# Altium PCB recovery.PcbDoc (part 1 of 2)
Units mm, origin at the board's own origin, x right, y up, seen from the top; angles counter-clockwise.
Board outline 117.35 x 49.91 mm, 2 copper layers (Top Layer, Bottom Layer); 218 components, 132 nets, 666 pads, 35 vias.
Unrouted connection lines stored in the file: 377.
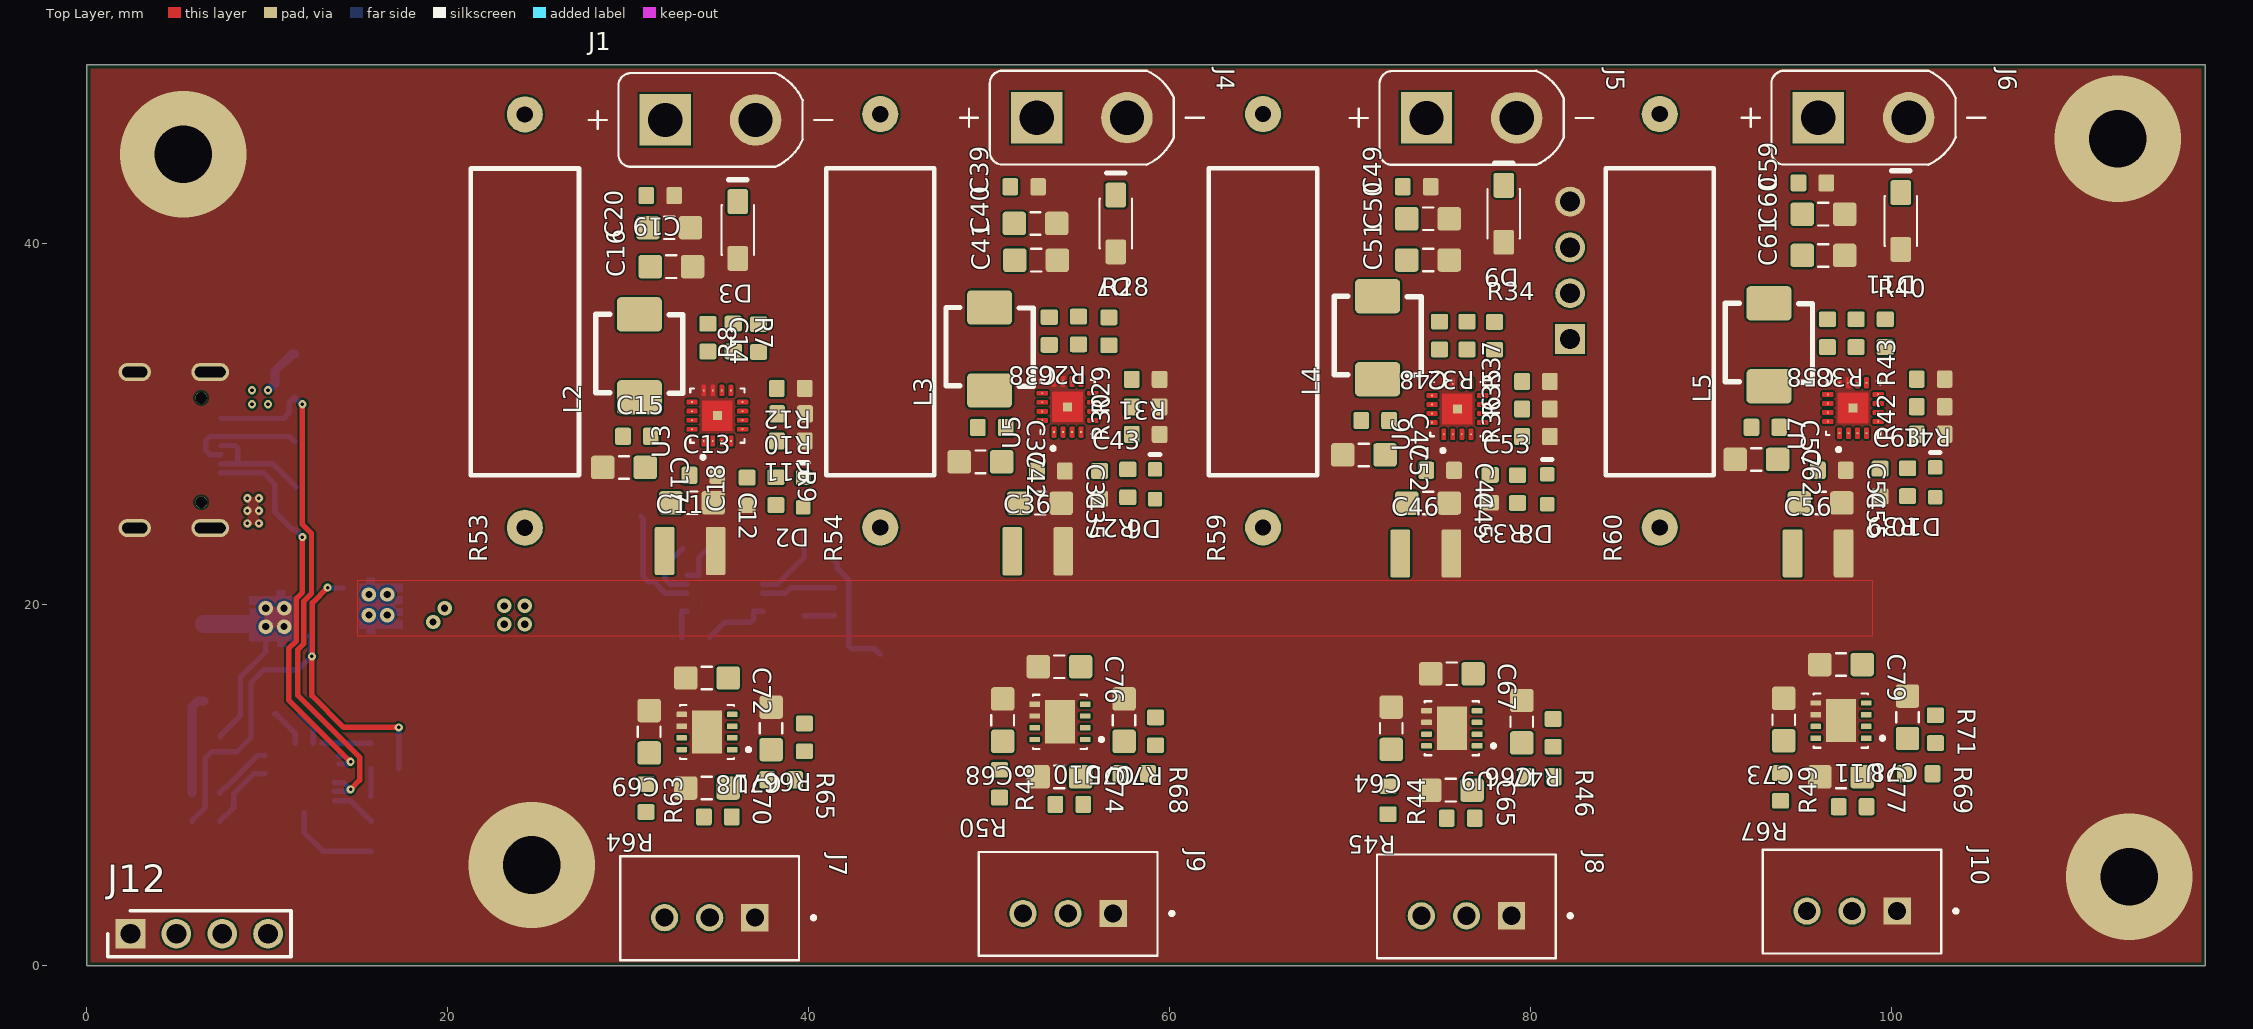
[diagram p0: Top Layer view]
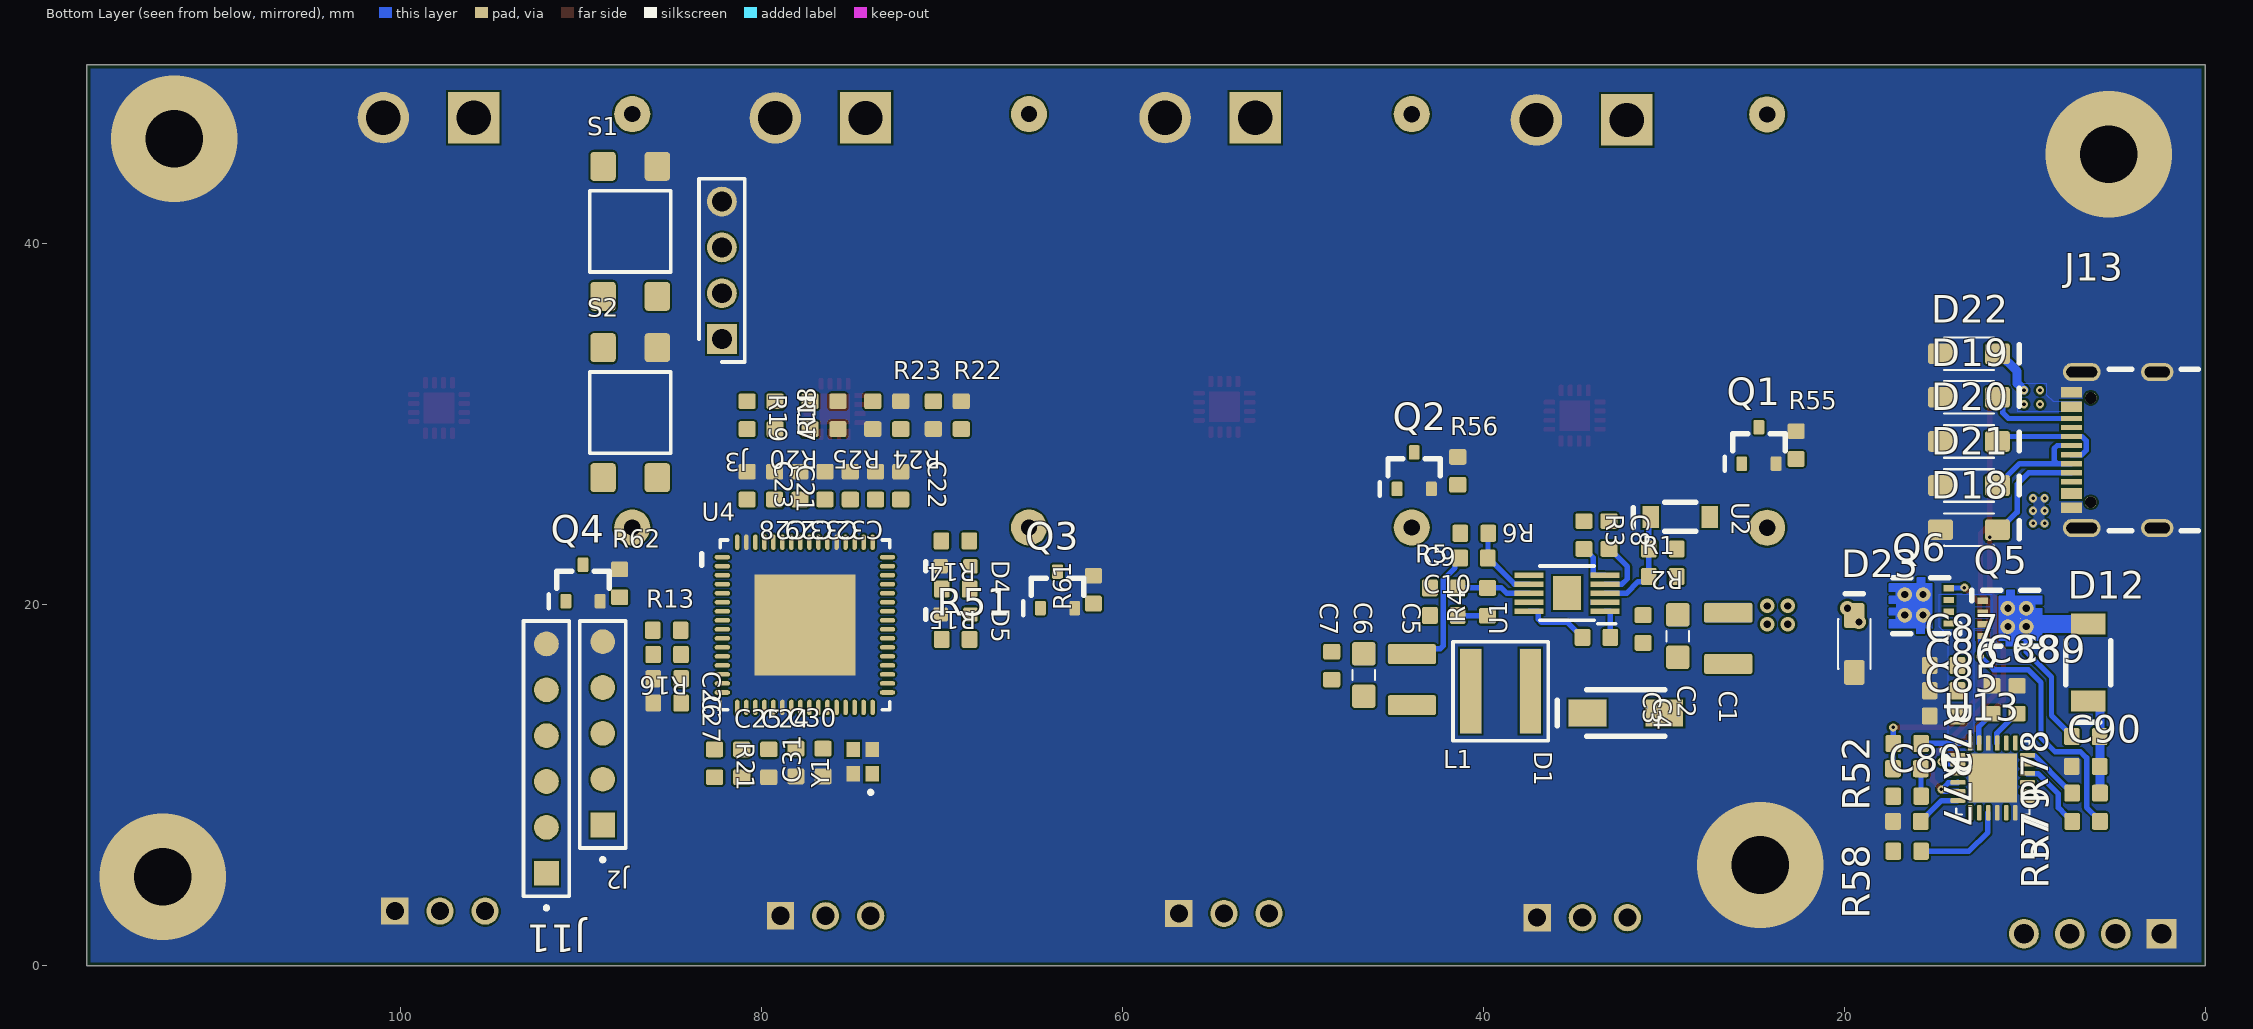
[diagram p1: Bottom Layer view, seen from below]

## Layer stack, top to bottom
Top Solder: solder mask 0.0102, Solder Resist, Dk 3.5
Top Layer: signal copper 0.0356
Dielectric 1: dielectric 0.32, FR-4, Dk 4.8
Bottom Layer: signal copper 0.0356
Bottom Solder: solder mask 0.0102, Solder Resist, Dk 3.5

## Board outline
0,0 0,49.911 117.348,49.911 117.348,0

## Design rules (kind name [scope] priority, off if disabled: settings)
BoardOutlineClearance [All] p1: gap=0.2 ignorepadtopadclearanceinfootprint=FALSE
Clearance [All] p1: gap=0.102 ignorepadtopadclearanceinfootprint=FALSE except(0.127: Arc-Via Track-Via SMDPad-Via THPad-Via Via-Via Via-Fill Via-Poly Via-Region Via-Text)
ComponentClearance [All] p1: gap=0.102 collisioncheckmode=3 verticalgap=0.102 showdistances=TRUE
DiffPairsRouting [All] p1: maxlimit=0.102 minlimit=0.102 mostfreqgap=0.102 toplayer_minwidth=0.102 toplayer_maxwidth=1816.048 toplayer_prefwidth=0.102 bottomlayer_minwidth=0.102 bottomlayer_maxwidth=1816.048 bottomlayer_prefwidth=0.102 maxuncoupledlength=12.7
Height [All] p1: minheight=0 maxheight=1816.048 prefheight=12.7
HoleSize [All] p1: absolutevalues=TRUE maxlimit=6.3 minlimit=0.2 maxpercent=80.000 minpercent=20.000
HoleToHoleClearance [All] p1: gap=0.25 allowstackedmicrovias=FALSE
MinimumAnnularRing [All] p1: minimumring=0.076
MinimumSolderMaskSliver [All] p1: minsoldermaskwidth=0
PlaneClearance [All] p1: clearance=0.102
PlaneConnect PlaneConnectPowerPads [InPadClass('PowerPads')] p1: planeconnectstyle=Direct reliefexpansion=0.508 reliefentries=4 reliefconductorwidth=0.254 reliefairgap=0.254
PlaneConnect [All] p2: pad.planeconnectstyle=Relief pad.reliefexpansion=0.3 pad.reliefentries=4 pad.reliefconductorwidth=0.102 pad.reliefairgap=0.102 via.planeconnectstyle=Direct via.reliefexpansion=0.3 via.reliefentries=4 via.reliefconductorwidth=0.127 via.reliefairgap=0.127
PolygonConnect PolygonConnectPowerPads [All vs (InPadClass('PowerPads'))] p1: connectstyle=Direct reliefconductorwidth=0.254 reliefentries=4 polygonreliefangle="90 Angle" airgapwidth=0.254
PolygonConnect [All] p2: connectstyle=Direct reliefconductorwidth=0.102 reliefentries=4 polygonreliefangle="90 Angle" airgapwidth=0.102
RoutingVias [All] p1: holewidth=0.2 width=0.45 viastyle="Through Hole" minholewidth=0.2 minwidth=0.45 maxholewidth=6.3 maxwidth=6.55
SilkToSilkClearance [All] p1: silktosilkclearance=0
SilkToSolderMaskClearance [IsPad] p1: minsilkscreentomaskgap=0.102 clearancetoexposedcopper=TRUE
SolderMaskExpansion [All] p1: expansion=0.075 istentingtop=FALSE
Width [All] p1: maxlimit=1816.048 minlimit=0.001 preferedwidth=0.102
20 further rules are at their usual default settings.

## Classes and differential pairs
component class USB: C80 C85 C86 C87 C88 C89 C90 D12 D23 J13 Q6 R52 R57 R58 R72 R77 R78 R79 U13
component class Dischargers: Q1 Q2 Q3 Q4 R53 R54 R55 R56 R59 R60 R61 R62
component class Balancers: C64 C65 C66 C67 C68 C69 C70 C71 C72 C73 C74 C75 C76 C77 C78 C79 J7 J8 J9 J10 R44 R45 R46 R47 R48 R49 R50 R63 R64 R65 R66 R67 R68 R69 R70 R71 U8 U9 U10 U11
component class MCU: C21 C22 C23 C24 C25 C26 C27 C28 C29 C30 C31 C32 C33 D4 D5 J2 J3 J11 J12 R13 R14 R15 R16 R17 R18 R19 R20 R21 R22 R23 R24 R25 R51 S1 S2 U4 Y1
component class Chargers: C11 C12 C13 C14 C15 C16 C17 C18 C19 C20 C34 C35 C36 C37 C38 C39 C40 C41 C42 C43 C44 C45 C46 C47 C48 C49 C50 C51 C52 C53 C54 C55 C56 C57 C58 C59 C60 C61 C62 C63 D2 D3 D6 D7 D8 D9 D10 D11 J1 J4 J5 J6 L2 L3 L4 L5 R7 R8 R9 R10 R11 R12 R26 R27 R28 R29 R30 R31 R32 R33 R34 R35 R36 R37 R38 R39 R40 R41 R42 R43 U3 U5 U6 U7
component class DCDC: C1 C2 C3 C4 C5 C6 C7 C8 C9 C10 D1 L1 M1 M2 M3 M4 R1 R2 R3 R4 R5 R6 U1 U2

## Components (designator, comment, footprint, x,y, rotation, side; value= is the part's Value field where it differs from the comment)
C1 "22uF" 1210_CAP 26.416,18.143 r90 bottom
C2 "10uF" 0805_CAP 29.21,18.27 r90 bottom
C3 "100nF" "0603 Capacitor" 31.133,18.669 r90 bottom
C4 "100nF" "0603 Capacitor" 33.731,18.197 r0 bottom
C5 "22uF" 1210_CAP 43.942,15.857 r90 bottom
C6 "10uF" 0805_CAP 46.609,16.111 r90 bottom
C7 "100nF" "0603 Capacitor" 48.387,16.637 r90 bottom
C8 "0.01uF" "0603 Capacitor" 33.02,23.858 r270 bottom
C9 "680pF" "0603 Capacitor" 42.164,20.937 r180 bottom
C10 "1nF" "0603 Capacitor" 42.164,19.413 r180 bottom
C11 "22uF" 1210_CAP 33.419,22.987 r0 top
C12 "10uF" 0805_CAP 33.528,25.654 r0 top
C13 "100nF" "0603 Capacitor" 34.163,27.178 r0 top
C14 "470pF" "0603 Capacitor" 34.4,34.797 r270 top
C15 "47nF placeholder" "0603 Capacitor" 30.48,29.337 r0 top
C16 "10uF" 0805_CAP 32.378,38.735 r180 top
C17 "10uF" 0805_CAP 29.753,27.613 r0 top
C18 "220nF" "0603 Capacitor" 36.576,26.289 r90 top
C19 "100nF" "0603 Capacitor" 31.75,42.672 r180 top
C20 "4.7uF" 0805_CAP 32.258,40.894 r180 top
C21 "100nF" "0603 Capacitor" 79.249,26.595 r270 bottom
C22 "1uF" "0603 Capacitor" 72.264,26.595 r270 bottom
C23 "1uF" "0603 Capacitor" 80.773,26.595 r270 bottom
C24 "1uF" "0603 Capacitor" 79.572,11.229 r90 bottom
C25 "1uF" "0603 Capacitor" 81.074,11.228 r90 bottom
C26 "1uF" "0603 Capacitor" 85.19,15.908 r180 bottom
C27 "1uF" "0603 Capacitor" 85.19,14.565 r180 bottom
C28 "1uF" "0603 Capacitor" 77.852,26.595 r270 bottom
C29 "1uF" "0603 Capacitor" 76.455,26.595 r270 bottom
C30 "15pF" "0603 Capacitor" 78.07,11.273 r90 bottom
C31 "15pF" "0603 Capacitor" 76.567,11.273 r90 bottom
C32 "1uF" "0603 Capacitor" 73.661,26.595 r270 bottom
C33 "1uF" "0603 Capacitor" 75.058,26.595 r270 bottom
C34 "100nF" "0603 Capacitor" 53.418,27.409 r0 top
C35 "10uF" 0805_CAP 52.805,25.635 r0 top
C36 "22uF" 1210_CAP 52.678,22.968 r0 top
C37 "47nF placeholder" "0603 Capacitor" 50.138,29.826 r0 top
C38 "470pF" "0603 Capacitor" 53.313,35.16 r270 top
C39 "100nF" "0603 Capacitor" 51.916,43.161 r180 top
C40 "4.7uF" 0805_CAP 52.551,41.129 r180 top
C41 "10uF" 0805_CAP 52.583,39.097 r180 top
C42 "10uF" 0805_CAP 49.503,27.921 r0 top
C43 "220nF" "0603 Capacitor" 56.107,26.651 r90 top
C44 "100nF" "0603 Capacitor" 74.975,27.453 r0 top
C45 "10uF" 0805_CAP 74.301,25.64 r0 top
C46 "22uF" 1210_CAP 74.174,22.846 r0 top
C47 "47nF placeholder" "0603 Capacitor" 71.38,30.212 r0 top
C48 "470pF" "0603 Capacitor" 74.936,34.911 r270 top
C49 "100nF" "0603 Capacitor" 73.666,43.166 r180 top
C50 "4.7uF" 0805_CAP 74.301,41.388 r180 top
C51 "10uF" 0805_CAP 74.301,39.102 r180 top
C52 "10uF" 0805_CAP 70.745,28.307 r0 top
C53 "220nF" "0603 Capacitor" 77.743,26.436 r90 top
C54 "100nF" "0603 Capacitor" 96.68,27.456 r0 top
C55 "10uF" 0805_CAP 96.052,25.644 r0 top
C56 "22uF" 1210_CAP 95.912,22.85 r0 top
C57 "47nF placeholder" "0603 Capacitor" 92.997,29.835 r0 top
C58 "470pF" "0603 Capacitor" 96.426,35.042 r270 top
C59 "100nF" "0603 Capacitor" 95.586,43.376 r180 top
C60 "4.7uF" 0805_CAP 96.206,41.646 r180 top
C61 "10uF" 0805_CAP 96.206,39.36 r180 top
C62 "10uF" 0805_CAP 92.489,28.057 r0 top
C63 "220nF" "0603 Capacitor" 99.347,26.787 r90 top
C64 "10uF" 0805_CAP 72.26,13.162 r270 top
C65 "10uF" 0805_CAP 75.565,9.733 r0 top
C66 "10uF" 0805_CAP 79.492,13.525 r270 top
C67 "10uF" 0805_CAP 75.621,16.179 r0 top
C68 "10uF" 0805_CAP 50.733,13.611 r270 top
C69 "10uF" 0805_CAP 31.147,12.968 r270 top
C70 "10uF" 0805_CAP 34.349,9.85 r0 top
C71 "10uF" 0805_CAP 37.905,13.152 r270 top
C72 "10uF" 0805_CAP 34.349,15.946 r0 top
C73 "10uF" 0805_CAP 94.004,13.643 r270 top
C74 "10uF" 0805_CAP 53.876,10.468 r0 top
C75 "10uF" 0805_CAP 57.459,13.611 r270 top
C76 "10uF" 0805_CAP 53.876,16.57 r0 top
C77 "10uF" 0805_CAP 97.179,10.468 r0 top
C78 "10uF" 0805_CAP 100.862,13.77 r270 top
C79 "10uF" 0805_CAP 97.179,16.691 r0 top
C80 "100nF" "0603 Capacitor" 16.51,9.398 r0 bottom
C85 "100nF" "0603 Capacitor" 14.478,13.843 r180 bottom
C86 "1uF" "0603 Capacitor" 14.478,15.24 r180 bottom
C87 "10uF" "0603 Capacitor" 14.478,16.637 r180 bottom
C88 "10uF" "0603 Capacitor" 11.811,14.732 r270 bottom
C89 "100nF" "0603 Capacitor" 10.414,14.732 r270 bottom
C90 "100nF" "0603 Capacitor" 6.604,11.049 r180 bottom
D1 "SS14" DIOM4330X250N 32.085,14.006 r180 bottom
D2 "LTST-C190KGKT" "LED 0603" 39.676,26.22 r270 top
D3 "SMF45A" SOD3718X102N 36.058,40.767 r270 top
D4 "LTST-C190KGKT" "LED 0603" 69.225,22.135 r180 bottom
D5 "LTST-C190KGKT" "LED 0603" 69.225,19.465 r180 bottom
D6 "LTST-C190KGKT" "LED 0603" 59.174,26.678 r270 top
D7 "SMF45A" SOD3718X102N 57.002,41.129 r270 top
D8 "LTST-C190KGKT" "LED 0603" 80.905,26.402 r270 top
D9 "SMF45A" SOD3718X102N 78.492,41.665 r270 top
D10 "LTST-C190KGKT" "LED 0603" 102.395,26.787 r270 top
D11 "SMF45A" SOD3718X102N 100.49,41.265 r270 top
D12 "SS54FSH" SODFL4725X110N 6.477,16.804 r90 bottom
D18 "SMF24A" SOD3718X102N 13.081,24.162 r0 bottom
D19 "SMF24A" SOD3718X102N 13.081,31.496 r0 bottom
D20 "SMF24A" SOD3718X102N 13.081,29.051 r0 bottom
D21 "SMF24A" SOD3718X102N 13.081,26.607 r0 bottom
D22 "SMF64A" SOD3718X102N 13.081,33.909 r0 bottom
D23 "SMF64A" SOD3718X102N 19.431,17.831 r270 bottom
J1 "XT30PW-N" AMASS_XT30UPB-M 34.544,46.863 r0 top
J2 "5-534237-3" "5pin header" 88.774,14.149 r270 bottom
J3 "MTSW-104-07-G-S-000" HDRV4W64P0X254_1X4_1016X254X864P 82.17,34.723 r270 bottom
J4 "XT30PW-N" AMASS_XT30UPB-M 55.118,46.99 r0 top
J5 "XT30PW-N" AMASS_XT30UPB-M 76.714,46.976 r0 top
J6 "XT30PW-N" AMASS_XT30UPB-M 98.425,46.99 r0 top
J7 "B3B-XH-A(LF)(SN)" JST_B3B-XH-A(LF)(SN) 34.504,3.192 r0 top
J8 "B3B-XH-A(LF)(SN)" JST_B3B-XH-A(LF)(SN) 76.427,3.299 r0 top
J9 "B3B-XH-A(LF)(SN)" JST_B3B-XH-A(LF)(SN) 54.356,3.429 r0 top
J10 "B3B-XH-A(LF)(SN)" JST_B3B-XH-A(LF)(SN) 97.79,3.556 r0 top
J11 "MTSW-106-07-L-S-210" SAMTEC_MTSW-106-23-L-S-240 91.892,11.482 r270 bottom
J12 "MTSW-104-07-G-S-000" HDRV4W64P0X254_1X4_1016X254X864P 2.413,1.778 r180 top
J13 "USBC-4105-GF-A" GCT_USB4105-GF-A 2.65,28.575 r90 bottom
L1 "XGL5050-103MEC" XGL5050 39.029,15.214 r0 bottom
L2 "HPPC05030-1R0M-Q8" HPPC05030 30.607,31.496 r90 top value=1uH
L3 "HPPC05030-1R0M-Q8" HPPC05030 50.005,31.873 r90 top value=1uH
L4 "HPPC05030-1R0M-Q8" HPPC05030 71.507,32.498 r90 top value=1uH
L5 "HPPC05030-1R0M-Q8" HPPC05030 93.188,32.107 r90 top value=1uH
Q1 "BSS138" TRANS_SS8050-G 24.714,28.829 r90 bottom
Q2 "BSS138" TRANS_SS8050-G 43.815,27.432 r90 bottom
Q3 "BSS138" TRANS_SS8050-G 63.576,20.828 r90 bottom
Q4 "BSS138" TRANS_SS8050-G 89.865,21.209 r90 bottom
Q5 "G200P04D3" TRANS_AONR21321#1 10.769,19.248 r180 bottom
Q6 "G200P04D3" TRANS_AONR21321#2 15.748,19.939 r0 bottom
R1 "110k" "0603 Resistor" 30.035,21.572 r180 bottom
R2 "110k" "0603 Resistor" 30.053,23.096 r0 bottom
R3 "220k" "0603 Resistor" 34.417,23.858 r270 bottom
R4 "15k" "0603 Resistor" 39.751,20.175 r90 bottom
R5 "15k" "0603 Resistor" 40.513,22.588 r0 bottom
R6 "15k" "0603 Resistor" 40.479,23.963 r180 bottom
R7 "10k" "0603 Resistor" 35.807,34.802 r270 top
R8 "10k" "0603 Resistor" 37.214,34.79 r90 top
R9 "10k" "0603 Resistor" 38.17,26.289 r270 top
R10 "10k" "0603 Resistor" 39,30.584 r180 top
R11 "10k" "0603 Resistor" 38.989,29.083 r180 top
R12 "10k" "0603 Resistor" 38.985,31.991 r180 top
R13 "10k" "0603 Resistor" 85.218,18.594 r180 bottom
R14 "10k" "0603 Resistor" 69.248,23.545 r0 bottom
R15 "10k" "0603 Resistor" 69.225,20.875 r0 bottom
R16 "10k" "0603 Resistor" 85.218,17.251 r0 bottom
R17 "10k" "0603 Resistor" 79.223,30.501 r270 bottom
R18 "10k" "0603 Resistor" 75.742,30.519 r90 bottom
R19 "10k" "0603 Resistor" 80.773,30.501 r270 bottom
R20 "10k" "0603 Resistor" 77.292,30.501 r270 bottom
R21 "10k" "0603 Resistor" 82.576,11.21 r270 bottom
R22 "10k" "0603 Resistor" 68.908,30.519 r90 bottom
R23 "10k" "0603 Resistor" 72.261,30.519 r90 bottom
R24 "10k" "0603 Resistor" 70.457,30.501 r270 bottom
R25 "10k" "0603 Resistor" 73.811,30.501 r270 bottom
R26 "10k" "0603 Resistor" 54.935,35.19 r270 top
R27 "10k" "0603 Resistor" 57.666,26.723 r270 top
R28 "10k" "0603 Resistor" 56.615,35.16 r90 top
R29 "10k" "0603 Resistor" 58.647,30.969 r180 top
R30 "10k" "0603 Resistor" 58.647,29.445 r180 top
R31 "10k" "0603 Resistor" 58.647,32.493 r180 top
R32 "10k" "0603 Resistor" 76.46,34.911 r270 top
R33 "10k" "0603 Resistor" 79.254,26.402 r270 top
R34 "10k" "0603 Resistor" 77.984,34.911 r90 top
R35 "10k" "0603 Resistor" 80.27,30.847 r180 top
R36 "10k" "0603 Resistor" 80.27,29.323 r180 top
R37 "10k" "0603 Resistor" 80.27,32.371 r180 top
R38 "10k" "0603 Resistor" 98.016,35.042 r270 top
R39 "10k" "0603 Resistor" 100.871,26.787 r270 top
R40 "10k" "0603 Resistor" 99.63,35.06 r90 top
R41 "10k" "0603 Resistor" 102.141,30.978 r180 top
R42 "10k" "0603 Resistor" 102.141,29.454 r180 top
R43 "10k" "0603 Resistor" 102.141,32.502 r180 top
R44 "10k" "0603 Resistor" 76.103,8.179 r180 top
R45 "10k" "0603 Resistor" 72.085,9.168 r270 top
R46 "10k" "0603 Resistor" 80.508,10.472 r0 top
R47 "10k" "0603 Resistor" 81.23,12.897 r270 top
R48 "10k" "0603 Resistor" 54.416,8.944 r180 top
R49 "10k" "0603 Resistor" 97.814,8.817 r180 top
R50 "10k" "0603 Resistor" 50.558,10.085 r270 top
R51 "10k" "0603 Resistor" 69.216,18.086 r180 bottom
R52 "100k" "0603 Resistor" 16.51,12.319 r0 bottom
R53 "10R" "THT 3W resistor" 24.26,24.272 r90 top
R54 "10R" "THT 3W resistor" 43.952,24.286 r90 top
R55 "Resistor 10k 0603" "0603 Resistor" 22.655,28.86 r90 bottom value=10k
R56 "Resistor 10k 0603" "0603 Resistor" 41.402,27.432 r90 bottom value=10k
R57 "22.1K" "0603 Resistor" 6.604,8.001 r0 bottom
R58 "1k" "0603 Resistor" 16.51,6.35 r0 bottom
R59 "10R" "THT 3W resistor" 65.159,24.287 r90 top
R60 "10R" "THT 3W resistor" 87.139,24.287 r90 top
R61 "Resistor 10k 0603" "0603 Resistor" 61.589,20.851 r90 bottom value=10k
R62 "Resistor 10k 0603" "0603 Resistor" 87.835,21.203 r90 bottom value=10k
R63 "10k" "0603 Resistor" 34.943,8.255 r180 top
R64 "10k" "0603 Resistor" 30.972,9.285 r270 top
R65 "10k" "0603 Resistor" 38.47,10.308 r0 top
R66 "10k" "0603 Resistor" 39.749,12.644 r270 top
R67 "10k" "0603 Resistor" 93.829,9.903 r270 top
R68 "10k" "0603 Resistor" 58.024,10.643 r0 top
R69 "10k" "0603 Resistor" 101.49,10.643 r0 top
R70 "10k" "0603 Resistor" 59.202,12.983 r270 top
R71 "10k" "0603 Resistor" 102.406,13.103 r270 top
R72 "100R" "0603 Resistor" 16.51,10.922 r180 bottom
R77 "10k" "0603 Resistor" 16.51,8.001 r180 bottom
R78 "470R" "0603 Resistor" 6.617,12.7 r0 bottom
R79 "1k" "0603 Resistor" 6.604,9.567 r0 bottom
S1 "TL3305BF160QG" SW_TL3305BF160QG 87.25,40.692 r90 bottom
S2 "TL3305BF160QG" SW_TL3305BF160QG 87.25,30.649 r90 bottom
U1 "TPS54160DGQRG4" IC_XTR111AIDGQR 35.346,20.649 r0 bottom
U2 "MMSZ5230BT1G" DIO_SZMMSZ5248CT1G 29.083,24.874 r180 bottom
U3 "BQ25306RTER" IC_BQ25306RTER 34.925,30.48 r90 top
U4 "ATmega329-16MU" ATmega329 77.57,18.893 r180 bottom
U5 "BQ25306RTER" IC_BQ25306RTER 54.329,30.969 r90 top
U6 "BQ25306RTER" IC_BQ25306RTER 75.922,30.847 r90 top
U7 "BQ25306RTER" IC_BQ25306RTER 97.847,30.905 r90 top
U8 "BQ29209DRBR" SON65P300X300X100-9N 34.352,12.954 r180 top
U9 "BQ29209DRBR" SON65P300X300X100-9N 75.621,13.162 r180 top
U10 "BQ29209DRBR" SON65P300X300X100-9N 53.908,13.516 r180 top
U11 "BQ29209DRBR" SON65P300X300X100-9N 97.176,13.587 r180 top
U13 "STUSB4500QTR" QFN50P400X400X90-25N 11.762,10.412 r180 bottom
Y1 "ECS-240-8-37CKM" XTAL_ECS-240-8-37CKM 74.378,11.313 r90 bottom

## Footprints (in the part's own frame and the unit in brackets; to place one, negate y for a bottom-side part, rotate by r counter-clockwise, add the part's x,y. Pads: shape width x height; smd on the part's side, far side on the other; paste and mask are expansions set on the pad)
"5pin header" [mm]
  rect 1.37x1.37 smd: 1(6.35,0)
  round 1.37 smd: 2(3.81,0) 3(1.27,0) 4(-1.27,0) 5(-3.81,0)
  silkscreen extent -4.95,-1.27 8.37,1.27
"0603 Capacitor" [mm]
  rrect25% 0.87x0.95 smd: 1(-0.78,0) 2(0.762,0)
  body extent -0.81,-0.41 0.79,0.39, height 0.8
"0603 Resistor" [mm]
  rrect25% 0.87x0.95 smd: 1(-0.78,0) 2(0.762,0)
  body extent -0.8,-0.4 0.8,0.4, height 0.46
0805_CAP [mm]
  rrect25% 1.3x1.3 smd: 1(-1.175,0) 2(1.175,0)
  silkscreen extent -0.28,-0.63 0.28,0.63, body extent -1,-0.63 1,0.63, height 0.95
1210_CAP [mm]
  rrect20% 1.1x2.67 smd: 1(-1.415,0) 2(1.415,0)
  body extent -1.7,-1.29 1.7,1.31, height 1.5
AMASS_XT30UPB-M [mm]
  round 2.85 hole 1.9 mask+0.102: N(2.5,0)
  rect 2.85x2.85 / inner round 2.85 / far side rect 2.85x2.85 hole 1.9 mask+0.102: P(-2.5,0)
  silkscreen extent -6.75,-2.61 6.75,2.61, body extent -5.1,-2.6 5.1,2.6, height 10.7
ATmega329 [mm] "QFN, 64-Leads, Body 9x9mm, Pitch 0.5mm, Thermal Pad 5.6x5.6mm, IPC Low Density"
  oval 0.85x0.25 smd: 1(-4.575,3.75) 2(-4.575,3.25) 3(-4.575,2.75) 4(-4.575,2.25) 5(-4.575,1.75) 6(-4.575,1.25) 7(-4.575,0.75) 8(-4.575,0.25) 9(-4.575,-0.25) 10(-4.575,-0.75) 11(-4.575,-1.25) 12(-4.575,-1.75) 13(-4.575,-2.25) 14(-4.575,-2.75) 15(-4.575,-3.25) 16(-4.575,-3.75) 33(4.575,-3.75) 34(4.575,-3.25) 35(4.575,-2.75) 36(4.575,-2.25) 37(4.575,-1.75) 38(4.575,-1.25) 39(4.575,-0.75) 40(4.575,-0.25) 41(4.575,0.25) 42(4.575,0.75) 43(4.575,1.25) 44(4.575,1.75) 45(4.575,2.25) 46(4.575,2.75) 47(4.575,3.25) 48(4.575,3.75)
  oval 0.25x0.85 smd: 17(-3.75,-4.575) 18(-3.25,-4.575) 19(-2.75,-4.575) 20(-2.25,-4.575) 21(-1.75,-4.575) 22(-1.25,-4.575) 23(-0.75,-4.575) 24(-0.25,-4.575) 25(0.25,-4.575) 26(0.75,-4.575) 27(1.25,-4.575) 28(1.75,-4.575) 29(2.25,-4.575) 30(2.75,-4.575) 31(3.25,-4.575) 32(3.75,-4.575) 49(3.75,4.575) 50(3.25,4.575) 51(2.75,4.575) 52(2.25,4.575) 53(1.75,4.575) 54(1.25,4.575) 55(0.75,4.575) 56(0.25,4.575) 57(-0.25,4.575) 58(-0.75,4.575) 59(-1.25,4.575) 60(-1.75,4.575) 61(-2.25,4.575) 62(-2.75,4.575) 63(-3.25,4.575) 64(-3.75,4.575)
  rect 5.6x5.6 smd: 65(0,0)
  silkscreen extent -5.71,-4.7 4.7,4.7, body extent -4.55,-4.55 4.55,4.55, height 1
DIO_SZMMSZ5248CT1G [mm]
  rect 0.91x1.22 smd paste+0 mask+0.102: 1(-1.635,0) 2(1.635,0)
  silkscreen extent -2.6,-0.8 0.86,0.8, body extent -1.84,-0.8 1.84,0.8, height 1.35
DIOM4330X250N [mm]
  rect 2.09x1.5 smd: A(2.13,0) C(-2.13,0)
  silkscreen extent -3.8,-1.28 2.16,1.28, body extent -2.57,-1.28 2.57,1.28, height 2.5
GCT_USB4105-GF-A [mm]
  rect 0.6x1.15 smd: A1_B12(-3.2,4.755) A4_B9(-2.4,4.755) B1_A12(3.2,4.755) B4_A9(2.4,4.755)
  rect 0.3x1.15 smd: A5(-1.25,4.755) A6(-0.25,4.755) A7(0.25,4.755) A8(1.25,4.755) B5(1.75,4.755) B6(0.75,4.755) B7(-0.75,4.755) B8(-1.75,4.755)
  oval 1x2.1 hole 0.6 slot 1.7 at 90 deg: SH1(-4.32,4.18) SH2(4.32,4.18)
  oval 1x1.8 hole 0.6 slot 1.4 at 90 deg: SH3(-4.32,0) SH4(4.32,0)
  round 0.65 hole 0.65 unplated: ""(-2.89,3.68) ""(2.89,3.68)
  silkscreen extent -4.47,-2.29 4.47,2.65, body extent -4.47,-2.6 4.47,5.11, height 3.31
HDRV4W64P0X254_1X4_1016X254X864P [mm]
  rect 1.65x1.65 / inner round 1.65 / far side rect 1.65x1.65 hole 1.1: 1(0,0)
  round 1.65 hole 1.1: 2(-2.54,0) 3(-5.08,0) 4(-7.62,0)
  silkscreen extent -8.89,-1.27 1.27,1.27, body extent -8.89,-1.27 1.27,1.27, height 8.64
HPPC05030 [mm]
  rrect25% 1.9x2.5 smd: 1(0,0) 2(4.6,0)
  silkscreen extent 0.23,-2.41 4.6,2.41
IC_BQ25306RTER [mm]
  rect 0.1x0.1 smd paste-1 mask+0: 1(-1.4,0.75) 2(-1.4,0.25) 3(-1.4,-0.25) 4(-1.4,-0.75) 5(-0.75,-1.4) 6(-0.25,-1.4) 7(0.25,-1.4) 8(0.75,-1.4) 9(1.4,-0.75) 10(1.4,-0.25) 11(1.4,0.25) 12(1.4,0.75) 13(0.75,1.4) 14(0.25,1.4) 15(-0.25,1.4) 16(-0.75,1.4)
  rect 0.5x0.5 smd paste-1 mask+0: 17(0,0)
  Top Layer region: 1.658,0.369 1.66,0.369 1.663,0.368 1.665,0.368 1.668,0.367 1.67,0.366 1.673,0.365 1.675,0.363 1.677,0.362 1.679,0.36 1.681,0.359 1.683,0.357 1.685,0.355 1.687,0.353 1.689,0.351 1.69,0.349 1.692,0.347 1.693,0.345 1.695,0.343 1.696,0.34 1.697,0.338 1.698,0.335 1.698,0.333 1.699,0.33 1.699,0.328 1.7,0.325 1.7,0.323 1.7,0.32 1.7,0.18 1.7,0.177 1.7,0.175 1.699,0.172 1.699,0.17 1.698,0.167 1.698,0.165 1.697,0.162 1.696,0.16 1.695,0.157 1.693,0.155 1.692,0.153 1.69,0.151 1.689,0.149 1.687,0.147 1.685,0.145 1.683,0.143 1.681,0.141 1.679,0.14 1.677,0.138 1.675,0.137 1.673,0.135 1.67,0.134 1.668,0.133 1.665,0.132 1.663,0.132 1.66,0.131 1.658,0.131 1.655,0.13 1.145,0.13 1.142,0.131 1.14,0.131 1.137,0.132 1.135,0.132 1.132,0.133 1.13,0.134 1.127,0.135 1.125,0.137 1.123,0.138 1.121,0.14 1.119,0.141 1.117,0.143 1.115,0.145 1.113,0.147 1.111,0.149 1.11,0.151 1.108,0.153 1.107,0.155 1.105,0.157 1.104,0.16 1.103,0.162 1.102,0.165 1.102,0.167 1.101,0.17 1.101,0.172 1.1,0.175 1.1,0.177 1.1,0.18 1.1,0.32 1.1,0.323 1.1,0.325 1.101,0.328 1.101,0.33 1.102,0.333 1.102,0.335 1.103,0.338 1.104,0.34 1.105,0.343 1.107,0.345 1.108,0.347 1.11,0.349 1.111,0.351 1.113,0.353 1.115,0.355 1.117,0.357 1.119,0.359 1.121,0.36 1.123,0.362 1.125,0.363 1.127,0.365 1.13,0.366 1.132,0.367 1.135,0.368 1.137,0.368 1.14,0.369 1.142,0.369 1.145,0.37 1.655,0.37
  Top Layer region: 1.658,0.869 1.66,0.869 1.663,0.868 1.665,0.868 1.668,0.867 1.67,0.866 1.673,0.865 1.675,0.863 1.677,0.862 1.679,0.86 1.681,0.859 1.683,0.857 1.685,0.855 1.687,0.853 1.689,0.851 1.69,0.849 1.692,0.847 1.693,0.845 1.695,0.843 1.696,0.84 1.697,0.838 1.698,0.835 1.698,0.833 1.699,0.83 1.699,0.828 1.7,0.825 1.7,0.823 1.7,0.82 1.7,0.68 1.7,0.677 1.7,0.675 1.699,0.672 1.699,0.67 1.698,0.667 1.698,0.665 1.697,0.662 1.696,0.66 1.695,0.657 1.693,0.655 1.692,0.653 1.69,0.651 1.689,0.649 1.687,0.647 1.685,0.645 1.683,0.643 1.681,0.641 1.679,0.64 1.677,0.638 1.675,0.637 1.673,0.635 1.67,0.634 1.668,0.633 1.665,0.632 1.663,0.632 1.66,0.631 1.658,0.631 1.655,0.63 1.145,0.63 1.142,0.631 1.14,0.631 1.137,0.632 1.135,0.632 1.132,0.633 1.13,0.634 1.127,0.635 1.125,0.637 1.123,0.638 1.121,0.64 1.119,0.641 1.117,0.643 1.115,0.645 1.113,0.647 1.111,0.649 1.11,0.651 1.108,0.653 1.107,0.655 1.105,0.657 1.104,0.66 1.103,0.662 1.102,0.665 1.102,0.667 1.101,0.67 1.101,0.672 1.1,0.675 1.1,0.677 1.1,0.68 1.1,0.82 1.1,0.823 1.1,0.825 1.101,0.828 1.101,0.83 1.102,0.833 1.102,0.835 1.103,0.838 1.104,0.84 1.105,0.843 1.107,0.845 1.108,0.847 1.11,0.849 1.111,0.851 1.113,0.853 1.115,0.855 1.117,0.857 1.119,0.859 1.121,0.86 1.123,0.862 1.125,0.863 1.127,0.865 1.13,0.866 1.132,0.867 1.135,0.868 1.137,0.868 1.14,0.869 1.142,0.869 1.145,0.87 1.655,0.87
  Top Layer region: 0.798,0.839 0.8,0.839 0.803,0.838 0.805,0.838 0.808,0.837 0.81,0.836 0.813,0.835 0.815,0.833 0.817,0.832 0.819,0.83 0.821,0.829 0.823,0.827 0.825,0.825 0.827,0.823 0.829,0.821 0.83,0.819 0.832,0.817 0.833,0.815 0.835,0.813 0.836,0.81 0.837,0.808 0.838,0.805 0.838,0.803 0.839,0.8 0.839,0.798 0.84,0.795 0.84,0.793 0.84,0.79 0.84,-0.79 0.84,-0.793 0.84,-0.795 0.839,-0.798 0.839,-0.8 0.838,-0.803 0.838,-0.805 0.837,-0.808 0.836,-0.81 0.835,-0.813 0.833,-0.815 0.832,-0.817 0.83,-0.819 0.829,-0.821 0.827,-0.823 0.825,-0.825 0.823,-0.827 0.821,-0.829 0.819,-0.83 0.817,-0.832 0.815,-0.833 0.813,-0.835 0.81,-0.836 0.808,-0.837 0.805,-0.838 0.803,-0.838 0.8,-0.839 0.798,-0.839 0.795,-0.84 -0.795,-0.84 -0.798,-0.839 -0.8,-0.839 -0.803,-0.838 -0.805,-0.838 -0.808,-0.837 -0.81,-0.836 -0.813,-0.835 -0.815,-0.833 -0.817,-0.832 -0.819,-0.83 -0.821,-0.829 -0.823,-0.827 -0.825,-0.825 -0.827,-0.823 -0.829,-0.821 -0.83,-0.819 -0.832,-0.817 -0.833,-0.815 -0.835,-0.813 -0.836,-0.81 -0.837,-0.808 -0.838,-0.805 -0.838,-0.803 -0.839,-0.8 -0.839,-0.798 -0.84,-0.795 -0.84,-0.793 -0.84,-0.79 -0.84,0.79 -0.84,0.793 -0.84,0.795 -0.839,0.798 -0.839,0.8 -0.838,0.803 -0.838,0.805 -0.837,0.808 -0.836,0.81 -0.835,0.813 -0.833,0.815 -0.832,0.817 -0.83,0.819 -0.829,0.821 -0.827,0.823 -0.825,0.825 -0.823,0.827 -0.821,0.829 -0.819,0.83 -0.817,0.832 -0.815,0.833 -0.813,0.835 -0.81,0.836 -0.808,0.837 -0.805,0.838 -0.803,0.838 -0.8,0.839 -0.798,0.839 -0.795,0.84 0.795,0.84
  Top Layer region: 1.658,-0.131 1.66,-0.131 1.663,-0.132 1.665,-0.132 1.668,-0.133 1.67,-0.134 1.673,-0.135 1.675,-0.137 1.677,-0.138 1.679,-0.14 1.681,-0.141 1.683,-0.143 1.685,-0.145 1.687,-0.147 1.689,-0.149 1.69,-0.151 1.692,-0.153 1.693,-0.155 1.695,-0.157 1.696,-0.16 1.697,-0.162 1.698,-0.165 1.698,-0.167 1.699,-0.17 1.699,-0.172 1.7,-0.175 1.7,-0.177 1.7,-0.18 1.7,-0.32 1.7,-0.323 1.7,-0.325 1.699,-0.328 1.699,-0.33 1.698,-0.333 1.698,-0.335 1.697,-0.338 1.696,-0.34 1.695,-0.343 1.693,-0.345 1.692,-0.347 1.69,-0.349 1.689,-0.351 1.687,-0.353 1.685,-0.355 1.683,-0.357 1.681,-0.359 1.679,-0.36 1.677,-0.362 1.675,-0.363 1.673,-0.365 1.67,-0.366 1.668,-0.367 1.665,-0.368 1.663,-0.368 1.66,-0.369 1.658,-0.369 1.655,-0.37 1.145,-0.37 1.142,-0.369 1.14,-0.369 1.137,-0.368 1.135,-0.368 1.132,-0.367 1.13,-0.366 1.127,-0.365 1.125,-0.363 1.123,-0.362 1.121,-0.36 1.119,-0.359 1.117,-0.357 1.115,-0.355 1.113,-0.353 1.111,-0.351 1.11,-0.349 1.108,-0.347 1.107,-0.345 1.105,-0.343 1.104,-0.34 1.103,-0.338 1.102,-0.335 1.102,-0.333 1.101,-0.33 1.101,-0.328 1.1,-0.325 1.1,-0.323 1.1,-0.32 1.1,-0.18 1.1,-0.177 1.1,-0.175 1.101,-0.172 1.101,-0.17 1.102,-0.167 1.102,-0.165 1.103,-0.162 1.104,-0.16 1.105,-0.157 1.107,-0.155 1.108,-0.153 1.11,-0.151 1.111,-0.149 1.113,-0.147 1.115,-0.145 1.117,-0.143 1.119,-0.141 1.121,-0.14 1.123,-0.138 1.125,-0.137 1.127,-0.135 1.13,-0.134 1.132,-0.133 1.135,-0.132 1.137,-0.132 1.14,-0.131 1.142,-0.131 1.145,-0.13 1.655,-0.13
  Top Layer region: -1.142,0.869 -1.14,0.869 -1.137,0.868 -1.135,0.868 -1.132,0.867 -1.13,0.866 -1.127,0.865 -1.125,0.863 -1.123,0.862 -1.121,0.86 -1.119,0.859 -1.117,0.857 -1.115,0.855 -1.113,0.853 -1.111,0.851 -1.11,0.849 -1.108,0.847 -1.107,0.845 -1.105,0.843 -1.104,0.84 -1.103,0.838 -1.102,0.835 -1.102,0.833 -1.101,0.83 -1.101,0.828 -1.1,0.825 -1.1,0.823 -1.1,0.82 -1.1,0.68 -1.1,0.677 -1.1,0.675 -1.101,0.672 -1.101,0.67 -1.102,0.667 -1.102,0.665 -1.103,0.662 -1.104,0.66 -1.105,0.657 -1.107,0.655 -1.108,0.653 -1.11,0.651 -1.111,0.649 -1.113,0.647 -1.115,0.645 -1.117,0.643 -1.119,0.641 -1.121,0.64 -1.123,0.638 -1.125,0.637 -1.127,0.635 -1.13,0.634 -1.132,0.633 -1.135,0.632 -1.137,0.632 -1.14,0.631 -1.142,0.631 -1.145,0.63 -1.655,0.63 -1.658,0.631 -1.66,0.631 -1.663,0.632 -1.665,0.632 -1.668,0.633 -1.67,0.634 -1.673,0.635 -1.675,0.637 -1.677,0.638 -1.679,0.64 -1.681,0.641 -1.683,0.643 -1.685,0.645 -1.687,0.647 -1.689,0.649 -1.69,0.651 -1.692,0.653 -1.693,0.655 -1.695,0.657 -1.696,0.66 -1.697,0.662 -1.698,0.665 -1.698,0.667 -1.699,0.67 -1.699,0.672 -1.7,0.675 -1.7,0.677 -1.7,0.68 -1.7,0.82 -1.7,0.823 -1.7,0.825 -1.699,0.828 -1.699,0.83 -1.698,0.833 -1.698,0.835 -1.697,0.838 -1.696,0.84 -1.695,0.843 -1.693,0.845 -1.692,0.847 -1.69,0.849 -1.689,0.851 -1.687,0.853 -1.685,0.855 -1.683,0.857 -1.681,0.859 -1.679,0.86 -1.677,0.862 -1.675,0.863 -1.673,0.865 -1.67,0.866 -1.668,0.867 -1.665,0.868 -1.663,0.868 -1.66,0.869 -1.658,0.869 -1.655,0.87 -1.145,0.87
  Top Layer region: -1.142,0.369 -1.14,0.369 -1.137,0.368 -1.135,0.368 -1.132,0.367 -1.13,0.366 -1.127,0.365 -1.125,0.363 -1.123,0.362 -1.121,0.36 -1.119,0.359 -1.117,0.357 -1.115,0.355 -1.113,0.353 -1.111,0.351 -1.11,0.349 -1.108,0.347 -1.107,0.345 -1.105,0.343 -1.104,0.34 -1.103,0.338 -1.102,0.335 -1.102,0.333 -1.101,0.33 -1.101,0.328 -1.1,0.325 -1.1,0.323 -1.1,0.32 -1.1,0.18 -1.1,0.177 -1.1,0.175 -1.101,0.172 -1.101,0.17 -1.102,0.167 -1.102,0.165 -1.103,0.162 -1.104,0.16 -1.105,0.157 -1.107,0.155 -1.108,0.153 -1.11,0.151 -1.111,0.149 -1.113,0.147 -1.115,0.145 -1.117,0.143 -1.119,0.141 -1.121,0.14 -1.123,0.138 -1.125,0.137 -1.127,0.135 -1.13,0.134 -1.132,0.133 -1.135,0.132 -1.137,0.132 -1.14,0.131 -1.142,0.131 -1.145,0.13 -1.655,0.13 -1.658,0.131 -1.66,0.131 -1.663,0.132 -1.665,0.132 -1.668,0.133 -1.67,0.134 -1.673,0.135 -1.675,0.137 -1.677,0.138 -1.679,0.14 -1.681,0.141 -1.683,0.143 -1.685,0.145 -1.687,0.147 -1.689,0.149 -1.69,0.151 -1.692,0.153 -1.693,0.155 -1.695,0.157 -1.696,0.16 -1.697,0.162 -1.698,0.165 -1.698,0.167 -1.699,0.17 -1.699,0.172 -1.7,0.175 -1.7,0.177 -1.7,0.18 -1.7,0.32 -1.7,0.323 -1.7,0.325 -1.699,0.328 -1.699,0.33 -1.698,0.333 -1.698,0.335 -1.697,0.338 -1.696,0.34 -1.695,0.343 -1.693,0.345 -1.692,0.347 -1.69,0.349 -1.689,0.351 -1.687,0.353 -1.685,0.355 -1.683,0.357 -1.681,0.359 -1.679,0.36 -1.677,0.362 -1.675,0.363 -1.673,0.365 -1.67,0.366 -1.668,0.367 -1.665,0.368 -1.663,0.368 -1.66,0.369 -1.658,0.369 -1.655,0.37 -1.145,0.37
  Top Layer region: -1.142,-0.131 -1.14,-0.131 -1.137,-0.132 -1.135,-0.132 -1.132,-0.133 -1.13,-0.134 -1.127,-0.135 -1.125,-0.137 -1.123,-0.138 -1.121,-0.14 -1.119,-0.141 -1.117,-0.143 -1.115,-0.145 -1.113,-0.147 -1.111,-0.149 -1.11,-0.151 -1.108,-0.153 -1.107,-0.155 -1.105,-0.157 -1.104,-0.16 -1.103,-0.162 -1.102,-0.165 -1.102,-0.167 -1.101,-0.17 -1.101,-0.172 -1.1,-0.175 -1.1,-0.177 -1.1,-0.18 -1.1,-0.32 -1.1,-0.323 -1.1,-0.325 -1.101,-0.328 -1.101,-0.33 -1.102,-0.333 -1.102,-0.335 -1.103,-0.338 -1.104,-0.34 -1.105,-0.343 -1.107,-0.345 -1.108,-0.347 -1.11,-0.349 -1.111,-0.351 -1.113,-0.353 -1.115,-0.355 -1.117,-0.357 -1.119,-0.359 -1.121,-0.36 -1.123,-0.362 -1.125,-0.363 -1.127,-0.365 -1.13,-0.366 -1.132,-0.367 -1.135,-0.368 -1.137,-0.368 -1.14,-0.369 -1.142,-0.369 -1.145,-0.37 -1.655,-0.37 -1.658,-0.369 -1.66,-0.369 -1.663,-0.368 -1.665,-0.368 -1.668,-0.367 -1.67,-0.366 -1.673,-0.365 -1.675,-0.363 -1.677,-0.362 -1.679,-0.36 -1.681,-0.359 -1.683,-0.357 -1.685,-0.355 -1.687,-0.353 -1.689,-0.351 -1.69,-0.349 -1.692,-0.347 -1.693,-0.345 -1.695,-0.343 -1.696,-0.34 -1.697,-0.338 -1.698,-0.335 -1.698,-0.333 -1.699,-0.33 -1.699,-0.328 -1.7,-0.325 -1.7,-0.323 -1.7,-0.32 -1.7,-0.18 -1.7,-0.177 -1.7,-0.175 -1.699,-0.172 -1.699,-0.17 -1.698,-0.167 -1.698,-0.165 -1.697,-0.162 -1.696,-0.16 -1.695,-0.157 -1.693,-0.155 -1.692,-0.153 -1.69,-0.151 -1.689,-0.149 -1.687,-0.147 -1.685,-0.145 -1.683,-0.143 -1.681,-0.141 -1.679,-0.14 -1.677,-0.138 -1.675,-0.137 -1.673,-0.135 -1.67,-0.134 -1.668,-0.133 -1.665,-0.132 -1.663,-0.132 -1.66,-0.131 -1.658,-0.131 -1.655,-0.13 -1.145,-0.13
  Top Layer region: -1.142,-0.631 -1.14,-0.631 -1.137,-0.632 -1.135,-0.632 -1.132,-0.633 -1.13,-0.634 -1.127,-0.635 -1.125,-0.637 -1.123,-0.638 -1.121,-0.64 -1.119,-0.641 -1.117,-0.643 -1.115,-0.645 -1.113,-0.647 -1.111,-0.649 -1.11,-0.651 -1.108,-0.653 -1.107,-0.655 -1.105,-0.657 -1.104,-0.66 -1.103,-0.662 -1.102,-0.665 -1.102,-0.667 -1.101,-0.67 -1.101,-0.672 -1.1,-0.675 -1.1,-0.677 -1.1,-0.68 -1.1,-0.82 -1.1,-0.823 -1.1,-0.825 -1.101,-0.828 -1.101,-0.83 -1.102,-0.833 -1.102,-0.835 -1.103,-0.838 -1.104,-0.84 -1.105,-0.843 -1.107,-0.845 -1.108,-0.847 -1.11,-0.849 -1.111,-0.851 -1.113,-0.853 -1.115,-0.855 -1.117,-0.857 -1.119,-0.859 -1.121,-0.86 -1.123,-0.862 -1.125,-0.863 -1.127,-0.865 -1.13,-0.866 -1.132,-0.867 -1.135,-0.868 -1.137,-0.868 -1.14,-0.869 -1.142,-0.869 -1.145,-0.87 -1.655,-0.87 -1.658,-0.869 -1.66,-0.869 -1.663,-0.868 -1.665,-0.868 -1.668,-0.867 -1.67,-0.866 -1.673,-0.865 -1.675,-0.863 -1.677,-0.862 -1.679,-0.86 -1.681,-0.859 -1.683,-0.857 -1.685,-0.855 -1.687,-0.853 -1.689,-0.851 -1.69,-0.849 -1.692,-0.847 -1.693,-0.845 -1.695,-0.843 -1.696,-0.84 -1.697,-0.838 -1.698,-0.835 -1.698,-0.833 -1.699,-0.83 -1.699,-0.828 -1.7,-0.825 -1.7,-0.823 -1.7,-0.82 -1.7,-0.68 -1.7,-0.677 -1.7,-0.675 -1.699,-0.672 -1.699,-0.67 -1.698,-0.667 -1.698,-0.665 -1.697,-0.662 -1.696,-0.66 -1.695,-0.657 -1.693,-0.655 -1.692,-0.653 -1.69,-0.651 -1.689,-0.649 -1.687,-0.647 -1.685,-0.645 -1.683,-0.643 -1.681,-0.641 -1.679,-0.64 -1.677,-0.638 -1.675,-0.637 -1.673,-0.635 -1.67,-0.634 -1.668,-0.633 -1.665,-0.632 -1.663,-0.632 -1.66,-0.631 -1.658,-0.631 -1.655,-0.63 -1.145,-0.63
  Top Layer region: 1.658,-0.631 1.66,-0.631 1.663,-0.632 1.665,-0.632 1.668,-0.633 1.67,-0.634 1.673,-0.635 1.675,-0.637 1.677,-0.638 1.679,-0.64 1.681,-0.641 1.683,-0.643 1.685,-0.645 1.687,-0.647 1.689,-0.649 1.69,-0.651 1.692,-0.653 1.693,-0.655 1.695,-0.657 1.696,-0.66 1.697,-0.662 1.698,-0.665 1.698,-0.667 1.699,-0.67 1.699,-0.672 1.7,-0.675 1.7,-0.677 1.7,-0.68 1.7,-0.82 1.7,-0.823 1.7,-0.825 1.699,-0.828 1.699,-0.83 1.698,-0.833 1.698,-0.835 1.697,-0.838 1.696,-0.84 1.695,-0.843 1.693,-0.845 1.692,-0.847 1.69,-0.849 1.689,-0.851 1.687,-0.853 1.685,-0.855 1.683,-0.857 1.681,-0.859 1.679,-0.86 1.677,-0.862 1.675,-0.863 1.673,-0.865 1.67,-0.866 1.668,-0.867 1.665,-0.868 1.663,-0.868 1.66,-0.869 1.658,-0.869 1.655,-0.87 1.145,-0.87 1.142,-0.869 1.14,-0.869 1.137,-0.868 1.135,-0.868 1.132,-0.867 1.13,-0.866 1.127,-0.865 1.125,-0.863 1.123,-0.862 1.121,-0.86 1.119,-0.859 1.117,-0.857 1.115,-0.855 1.113,-0.853 1.111,-0.851 1.11,-0.849 1.108,-0.847 1.107,-0.845 1.105,-0.843 1.104,-0.84 1.103,-0.838 1.102,-0.835 1.102,-0.833 1.101,-0.83 1.101,-0.828 1.1,-0.825 1.1,-0.823 1.1,-0.82 1.1,-0.68 1.1,-0.677 1.1,-0.675 1.101,-0.672 1.101,-0.67 1.102,-0.667 1.102,-0.665 1.103,-0.662 1.104,-0.66 1.105,-0.657 1.107,-0.655 1.108,-0.653 1.11,-0.651 1.111,-0.649 1.113,-0.647 1.115,-0.645 1.117,-0.643 1.119,-0.641 1.121,-0.64 1.123,-0.638 1.125,-0.637 1.127,-0.635 1.13,-0.634 1.132,-0.633 1.135,-0.632 1.137,-0.632 1.14,-0.631 1.142,-0.631 1.145,-0.63 1.655,-0.63
  Top Layer region: -0.172,1.699 -0.17,1.699 -0.167,1.698 -0.165,1.698 -0.162,1.697 -0.16,1.696 -0.157,1.695 -0.155,1.693 -0.153,1.692 -0.151,1.69 -0.149,1.689 -0.147,1.687 -0.145,1.685 -0.143,1.683 -0.141,1.681 -0.14,1.679 -0.138,1.677 -0.137,1.675 -0.135,1.673 -0.134,1.67 -0.133,1.668 -0.132,1.665 -0.132,1.663 -0.131,1.66 -0.131,1.658 -0.13,1.655 -0.13,1.653 -0.13,1.65 -0.13,1.15 -0.13,1.147 -0.13,1.145 -0.131,1.142 -0.131,1.14 -0.132,1.137 -0.132,1.135 -0.133,1.132 -0.134,1.13 -0.135,1.127 -0.137,1.125 -0.138,1.123 -0.14,1.121 -0.141,1.119 -0.143,1.117 -0.145,1.115 -0.147,1.113 -0.149,1.111 -0.151,1.11 -0.153,1.108 -0.155,1.107 -0.157,1.105 -0.16,1.104 -0.162,1.103 -0.165,1.102 -0.167,1.102 -0.17,1.101 -0.172,1.101 -0.175,1.1 -0.325,1.1 -0.328,1.101 -0.33,1.101 -0.333,1.102 -0.335,1.102 -0.338,1.103 -0.34,1.104 -0.343,1.105 -0.345,1.107 -0.347,1.108 -0.349,1.11 -0.351,1.111 -0.353,1.113 -0.355,1.115 -0.357,1.117 -0.359,1.119 -0.36,1.121 -0.362,1.123 -0.363,1.125 -0.365,1.127 -0.366,1.13 -0.367,1.132 -0.368,1.135 -0.368,1.137 -0.369,1.14 -0.369,1.142 -0.37,1.145 -0.37,1.147 -0.37,1.15 -0.37,1.65 -0.37,1.653 -0.37,1.655 -0.369,1.658 -0.369,1.66 -0.368,1.663 -0.368,1.665 -0.367,1.668 -0.366,1.67 -0.365,1.673 -0.363,1.675 -0.362,1.677 -0.36,1.679 -0.359,1.681 -0.357,1.683 -0.355,1.685 -0.353,1.687 -0.351,1.689 -0.349,1.69 -0.347,1.692 -0.345,1.693 -0.343,1.695 -0.34,1.696 -0.338,1.697 -0.335,1.698 -0.333,1.698 -0.33,1.699 -0.328,1.699 -0.325,1.7 -0.175,1.7
  Top Layer region: -0.672,1.699 -0.67,1.699 -0.667,1.698 -0.665,1.698 -0.662,1.697 -0.66,1.696 -0.657,1.695 -0.655,1.693 -0.653,1.692 -0.651,1.69 -0.649,1.689 -0.647,1.687 -0.645,1.685 -0.643,1.683 -0.641,1.681 -0.64,1.679 -0.638,1.677 -0.637,1.675 -0.635,1.673 -0.634,1.67 -0.633,1.668 -0.632,1.665 -0.632,1.663 -0.631,1.66 -0.631,1.658 -0.63,1.655 -0.63,1.653 -0.63,1.65 -0.63,1.15 -0.63,1.147 -0.63,1.145 -0.631,1.142 -0.631,1.14 -0.632,1.137 -0.632,1.135 -0.633,1.132 -0.634,1.13 -0.635,1.127 -0.637,1.125 -0.638,1.123 -0.64,1.121 -0.641,1.119 -0.643,1.117 -0.645,1.115 -0.647,1.113 -0.649,1.111 -0.651,1.11 -0.653,1.108 -0.655,1.107 -0.657,1.105 -0.66,1.104 -0.662,1.103 -0.665,1.102 -0.667,1.102 -0.67,1.101 -0.672,1.101 -0.675,1.1 -0.825,1.1 -0.828,1.101 -0.83,1.101 -0.833,1.102 -0.835,1.102 -0.838,1.103 -0.84,1.104 -0.843,1.105 -0.845,1.107 -0.847,1.108 -0.849,1.11 -0.851,1.111 -0.853,1.113 -0.855,1.115 -0.857,1.117 -0.859,1.119 -0.86,1.121 -0.862,1.123 -0.863,1.125 -0.865,1.127 -0.866,1.13 -0.867,1.132 -0.868,1.135 -0.868,1.137 -0.869,1.14 -0.869,1.142 -0.87,1.145 -0.87,1.147 -0.87,1.15 -0.87,1.65 -0.87,1.653 -0.87,1.655 -0.869,1.658 -0.869,1.66 -0.868,1.663 -0.868,1.665 -0.867,1.668 -0.866,1.67 -0.865,1.673 -0.863,1.675 -0.862,1.677 -0.86,1.679 -0.859,1.681 -0.857,1.683 -0.855,1.685 -0.853,1.687 -0.851,1.689 -0.849,1.69 -0.847,1.692 -0.845,1.693 -0.843,1.695 -0.84,1.696 -0.838,1.697 -0.835,1.698 -0.833,1.698 -0.83,1.699 -0.828,1.699 -0.825,1.7 -0.675,1.7
  Top Layer region: 0.328,1.699 0.33,1.699 0.333,1.698 0.335,1.698 0.338,1.697 0.34,1.696 0.343,1.695 0.345,1.693 0.347,1.692 0.349,1.69 0.351,1.689 0.353,1.687 0.355,1.685 0.357,1.683 0.359,1.681 0.36,1.679 0.362,1.677 0.363,1.675 0.365,1.673 0.366,1.67 0.367,1.668 0.368,1.665 0.368,1.663 0.369,1.66 0.369,1.658 0.37,1.655 0.37,1.653 0.37,1.65 0.37,1.15 0.37,1.147 0.37,1.145 0.369,1.142 0.369,1.14 0.368,1.137 0.368,1.135 0.367,1.132 0.366,1.13 0.365,1.127 0.363,1.125 0.362,1.123 0.36,1.121 0.359,1.119 0.357,1.117 0.355,1.115 0.353,1.113 0.351,1.111 0.349,1.11 0.347,1.108 0.345,1.107 0.343,1.105 0.34,1.104 0.338,1.103 0.335,1.102 0.333,1.102 0.33,1.101 0.328,1.101 0.325,1.1 0.175,1.1 0.172,1.101 0.17,1.101 0.167,1.102 0.165,1.102 0.162,1.103 0.16,1.104 0.157,1.105 0.155,1.107 0.153,1.108 0.151,1.11 0.149,1.111 0.147,1.113 0.145,1.115 0.143,1.117 0.141,1.119 0.14,1.121 0.138,1.123 0.137,1.125 0.135,1.127 0.134,1.13 0.133,1.132 0.132,1.135 0.132,1.137 0.131,1.14 0.131,1.142 0.13,1.145 0.13,1.147 0.13,1.15 0.13,1.65 0.13,1.653 0.13,1.655 0.131,1.658 0.131,1.66 0.132,1.663 0.132,1.665 0.133,1.668 0.134,1.67 0.135,1.673 0.137,1.675 0.138,1.677 0.14,1.679 0.141,1.681 0.143,1.683 0.145,1.685 0.147,1.687 0.149,1.689 0.151,1.69 0.153,1.692 0.155,1.693 0.157,1.695 0.16,1.696 0.162,1.697 0.165,1.698 0.167,1.698 0.17,1.699 0.172,1.699 0.175,1.7 0.325,1.7
  Top Layer region: 0.828,1.699 0.83,1.699 0.833,1.698 0.835,1.698 0.838,1.697 0.84,1.696 0.843,1.695 0.845,1.693 0.847,1.692 0.849,1.69 0.851,1.689 0.853,1.687 0.855,1.685 0.857,1.683 0.859,1.681 0.86,1.679 0.862,1.677 0.863,1.675 0.865,1.673 0.866,1.67 0.867,1.668 0.868,1.665 0.868,1.663 0.869,1.66 0.869,1.658 0.87,1.655 0.87,1.653 0.87,1.65 0.87,1.15 0.87,1.147 0.87,1.145 0.869,1.142 0.869,1.14 0.868,1.137 0.868,1.135 0.867,1.132 0.866,1.13 0.865,1.127 0.863,1.125 0.862,1.123 0.86,1.121 0.859,1.119 0.857,1.117 0.855,1.115 0.853,1.113 0.851,1.111 0.849,1.11 0.847,1.108 0.845,1.107 0.843,1.105 0.84,1.104 0.838,1.103 0.835,1.102 0.833,1.102 0.83,1.101 0.828,1.101 0.825,1.1 0.675,1.1 0.672,1.101 0.67,1.101 0.667,1.102 0.665,1.102 0.662,1.103 0.66,1.104 0.657,1.105 0.655,1.107 0.653,1.108 0.651,1.11 0.649,1.111 0.647,1.113 0.645,1.115 0.643,1.117 0.641,1.119 0.64,1.121 0.638,1.123 0.637,1.125 0.635,1.127 0.634,1.13 0.633,1.132 0.632,1.135 0.632,1.137 0.631,1.14 0.631,1.142 0.63,1.145 0.63,1.147 0.63,1.15 0.63,1.65 0.63,1.653 0.63,1.655 0.631,1.658 0.631,1.66 0.632,1.663 0.632,1.665 0.633,1.668 0.634,1.67 0.635,1.673 0.637,1.675 0.638,1.677 0.64,1.679 0.641,1.681 0.643,1.683 0.645,1.685 0.647,1.687 0.649,1.689 0.651,1.69 0.653,1.692 0.655,1.693 0.657,1.695 0.66,1.696 0.662,1.697 0.665,1.698 0.667,1.698 0.67,1.699 0.672,1.699 0.675,1.7 0.825,1.7
  Top Layer region: -0.172,-1.101 -0.17,-1.101 -0.167,-1.102 -0.165,-1.102 -0.162,-1.103 -0.16,-1.104 -0.157,-1.105 -0.155,-1.107 -0.153,-1.108 -0.151,-1.11 -0.149,-1.111 -0.147,-1.113 -0.145,-1.115 -0.143,-1.117 -0.141,-1.119 -0.14,-1.121 -0.138,-1.123 -0.137,-1.125 -0.135,-1.127 -0.134,-1.13 -0.133,-1.132 -0.132,-1.135 -0.132,-1.137 -0.131,-1.14 -0.131,-1.142 -0.13,-1.145 -0.13,-1.147 -0.13,-1.15 -0.13,-1.65 -0.13,-1.653 -0.13,-1.655 -0.131,-1.658 -0.131,-1.66 -0.132,-1.663 -0.132,-1.665 -0.133,-1.668 -0.134,-1.67 -0.135,-1.673 -0.137,-1.675 -0.138,-1.677 -0.14,-1.679 -0.141,-1.681 -0.143,-1.683 -0.145,-1.685 -0.147,-1.687 -0.149,-1.689 -0.151,-1.69 -0.153,-1.692 -0.155,-1.693 -0.157,-1.695 -0.16,-1.696 -0.162,-1.697 -0.165,-1.698 -0.167,-1.698 -0.17,-1.699 -0.172,-1.699 -0.175,-1.7 -0.325,-1.7 -0.328,-1.699 -0.33,-1.699 -0.333,-1.698 -0.335,-1.698 -0.338,-1.697 -0.34,-1.696 -0.343,-1.695 -0.345,-1.693 -0.347,-1.692 -0.349,-1.69 -0.351,-1.689 -0.353,-1.687 -0.355,-1.685 -0.357,-1.683 -0.359,-1.681 -0.36,-1.679 -0.362,-1.677 -0.363,-1.675 -0.365,-1.673 -0.366,-1.67 -0.367,-1.668 -0.368,-1.665 -0.368,-1.663 -0.369,-1.66 -0.369,-1.658 -0.37,-1.655 -0.37,-1.653 -0.37,-1.65 -0.37,-1.15 -0.37,-1.147 -0.37,-1.145 -0.369,-1.142 -0.369,-1.14 -0.368,-1.137 -0.368,-1.135 -0.367,-1.132 -0.366,-1.13 -0.365,-1.127 -0.363,-1.125 -0.362,-1.123 -0.36,-1.121 -0.359,-1.119 -0.357,-1.117 -0.355,-1.115 -0.353,-1.113 -0.351,-1.111 -0.349,-1.11 -0.347,-1.108 -0.345,-1.107 -0.343,-1.105 -0.34,-1.104 -0.338,-1.103 -0.335,-1.102 -0.333,-1.102 -0.33,-1.101 -0.328,-1.101 -0.325,-1.1 -0.175,-1.1
  Top Layer region: -0.672,-1.101 -0.67,-1.101 -0.667,-1.102 -0.665,-1.102 -0.662,-1.103 -0.66,-1.104 -0.657,-1.105 -0.655,-1.107 -0.653,-1.108 -0.651,-1.11 -0.649,-1.111 -0.647,-1.113 -0.645,-1.115 -0.643,-1.117 -0.641,-1.119 -0.64,-1.121 -0.638,-1.123 -0.637,-1.125 -0.635,-1.127 -0.634,-1.13 -0.633,-1.132 -0.632,-1.135 -0.632,-1.137 -0.631,-1.14 -0.631,-1.142 -0.63,-1.145 -0.63,-1.147 -0.63,-1.15 -0.63,-1.65 -0.63,-1.653 -0.63,-1.655 -0.631,-1.658 -0.631,-1.66 -0.632,-1.663 -0.632,-1.665 -0.633,-1.668 -0.634,-1.67 -0.635,-1.673 -0.637,-1.675 -0.638,-1.677 -0.64,-1.679 -0.641,-1.681 -0.643,-1.683 -0.645,-1.685 -0.647,-1.687 -0.649,-1.689 -0.651,-1.69 -0.653,-1.692 -0.655,-1.693 -0.657,-1.695 -0.66,-1.696 -0.662,-1.697 -0.665,-1.698 -0.667,-1.698 -0.67,-1.699 -0.672,-1.699 -0.675,-1.7 -0.825,-1.7 -0.828,-1.699 -0.83,-1.699 -0.833,-1.698 -0.835,-1.698 -0.838,-1.697 -0.84,-1.696 -0.843,-1.695 -0.845,-1.693 -0.847,-1.692 -0.849,-1.69 -0.851,-1.689 -0.853,-1.687 -0.855,-1.685 -0.857,-1.683 -0.859,-1.681 -0.86,-1.679 -0.862,-1.677 -0.863,-1.675 -0.865,-1.673 -0.866,-1.67 -0.867,-1.668 -0.868,-1.665 -0.868,-1.663 -0.869,-1.66 -0.869,-1.658 -0.87,-1.655 -0.87,-1.653 -0.87,-1.65 -0.87,-1.15 -0.87,-1.147 -0.87,-1.145 -0.869,-1.142 -0.869,-1.14 -0.868,-1.137 -0.868,-1.135 -0.867,-1.132 -0.866,-1.13 -0.865,-1.127 -0.863,-1.125 -0.862,-1.123 -0.86,-1.121 -0.859,-1.119 -0.857,-1.117 -0.855,-1.115 -0.853,-1.113 -0.851,-1.111 -0.849,-1.11 -0.847,-1.108 -0.845,-1.107 -0.843,-1.105 -0.84,-1.104 -0.838,-1.103 -0.835,-1.102 -0.833,-1.102 -0.83,-1.101 -0.828,-1.101 -0.825,-1.1 -0.675,-1.1
  Top Layer region: 0.328,-1.101 0.33,-1.101 0.333,-1.102 0.335,-1.102 0.338,-1.103 0.34,-1.104 0.343,-1.105 0.345,-1.107 0.347,-1.108 0.349,-1.11 0.351,-1.111 0.353,-1.113 0.355,-1.115 0.357,-1.117 0.359,-1.119 0.36,-1.121 0.362,-1.123 0.363,-1.125 0.365,-1.127 0.366,-1.13 0.367,-1.132 0.368,-1.135 0.368,-1.137 0.369,-1.14 0.369,-1.142 0.37,-1.145 0.37,-1.147 0.37,-1.15 0.37,-1.65 0.37,-1.653 0.37,-1.655 0.369,-1.658 0.369,-1.66 0.368,-1.663 0.368,-1.665 0.367,-1.668 0.366,-1.67 0.365,-1.673 0.363,-1.675 0.362,-1.677 0.36,-1.679 0.359,-1.681 0.357,-1.683 0.355,-1.685 0.353,-1.687 0.351,-1.689 0.349,-1.69 0.347,-1.692 0.345,-1.693 0.343,-1.695 0.34,-1.696 0.338,-1.697 0.335,-1.698 0.333,-1.698 0.33,-1.699 0.328,-1.699 0.325,-1.7 0.175,-1.7 0.172,-1.699 0.17,-1.699 0.167,-1.698 0.165,-1.698 0.162,-1.697 0.16,-1.696 0.157,-1.695 0.155,-1.693 0.153,-1.692 0.151,-1.69 0.149,-1.689 0.147,-1.687 0.145,-1.685 0.143,-1.683 0.141,-1.681 0.14,-1.679 0.138,-1.677 0.137,-1.675 0.135,-1.673 0.134,-1.67 0.133,-1.668 0.132,-1.665 0.132,-1.663 0.131,-1.66 0.131,-1.658 0.13,-1.655 0.13,-1.653 0.13,-1.65 0.13,-1.15 0.13,-1.147 0.13,-1.145 0.131,-1.142 0.131,-1.14 0.132,-1.137 0.132,-1.135 0.133,-1.132 0.134,-1.13 0.135,-1.127 0.137,-1.125 0.138,-1.123 0.14,-1.121 0.141,-1.119 0.143,-1.117 0.145,-1.115 0.147,-1.113 0.149,-1.111 0.151,-1.11 0.153,-1.108 0.155,-1.107 0.157,-1.105 0.16,-1.104 0.162,-1.103 0.165,-1.102 0.167,-1.102 0.17,-1.101 0.172,-1.101 0.175,-1.1 0.325,-1.1
  Top Layer region: 0.828,-1.101 0.83,-1.101 0.833,-1.102 0.835,-1.102 0.838,-1.103 0.84,-1.104 0.843,-1.105 0.845,-1.107 0.847,-1.108 0.849,-1.11 0.851,-1.111 0.853,-1.113 0.855,-1.115 0.857,-1.117 0.859,-1.119 0.86,-1.121 0.862,-1.123 0.863,-1.125 0.865,-1.127 0.866,-1.13 0.867,-1.132 0.868,-1.135 0.868,-1.137 0.869,-1.14 0.869,-1.142 0.87,-1.145 0.87,-1.147 0.87,-1.15 0.87,-1.65 0.87,-1.653 0.87,-1.655 0.869,-1.658 0.869,-1.66 0.868,-1.663 0.868,-1.665 0.867,-1.668 0.866,-1.67 0.865,-1.673 0.863,-1.675 0.862,-1.677 0.86,-1.679 0.859,-1.681 0.857,-1.683 0.855,-1.685 0.853,-1.687 0.851,-1.689 0.849,-1.69 0.847,-1.692 0.845,-1.693 0.843,-1.695 0.84,-1.696 0.838,-1.697 0.835,-1.698 0.833,-1.698 0.83,-1.699 0.828,-1.699 0.825,-1.7 0.675,-1.7 0.672,-1.699 0.67,-1.699 0.667,-1.698 0.665,-1.698 0.662,-1.697 0.66,-1.696 0.657,-1.695 0.655,-1.693 0.653,-1.692 0.651,-1.69 0.649,-1.689 0.647,-1.687 0.645,-1.685 0.643,-1.683 0.641,-1.681 0.64,-1.679 0.638,-1.677 0.637,-1.675 0.635,-1.673 0.634,-1.67 0.633,-1.668 0.632,-1.665 0.632,-1.663 0.631,-1.66 0.631,-1.658 0.63,-1.655 0.63,-1.653 0.63,-1.65 0.63,-1.15 0.63,-1.147 0.63,-1.145 0.631,-1.142 0.631,-1.14 0.632,-1.137 0.632,-1.135 0.633,-1.132 0.634,-1.13 0.635,-1.127 0.637,-1.125 0.638,-1.123 0.64,-1.121 0.641,-1.119 0.643,-1.117 0.645,-1.115 0.647,-1.113 0.649,-1.111 0.651,-1.11 0.653,-1.108 0.655,-1.107 0.657,-1.105 0.66,-1.104 0.662,-1.103 0.665,-1.102 0.667,-1.102 0.67,-1.101 0.672,-1.101 0.675,-1.1 0.825,-1.1
  silkscreen extent -2.4,-1.5 1.5,1.5, body extent -1.5,-1.5 1.5,1.5, height 0.8
IC_XTR111AIDGQR [mm]
  rect 1.6x0.3 smd paste-0.025 mask+0.05: 1(-2.1,1) 2(-2.1,0.5) 3(-2.1,0) 4(-2.1,-0.5) 5(-2.1,-1) 6(2.1,-1) 7(2.1,-0.5) 8(2.1,0) 9(2.1,0.5) 10(2.1,1)
  rect 1.57x1.88 smd: 11(0,0)
  silkscreen extent -2.7,-1.5 1.5,1.7, body extent -2.45,-1.5 2.45,1.5, height 1.1
JST_B3B-XH-A(LF)(SN) [mm]
  rect 1.508x1.508 / inner round 1.508 / far side rect 1.508x1.508 hole 1 mask+0.102: 1(2.5,-0.525)
  round 1.508 hole 1 mask+0.102: 2(0,-0.525) 3(-2.5,-0.525)
  silkscreen extent -4.95,-2.88 5.85,2.88, body extent -4.95,-2.88 4.95,2.88, height 7
"LED 0603" [mm]
  rrect25% 0.8x0.8 smd: 1(0.825,0) 2(-0.825,0)
  silkscreen extent -1.65,-0.25 -1.65,0.25, body extent -0.81,-0.4 0.79,0.4, height 0.8
QFN50P400X400X90-25N [mm]
  rrect50% 0.84x0.26 smd: 1(-1.93,1.25) 2(-1.93,0.75) 3(-1.93,0.25) 4(-1.93,-0.25) 5(-1.93,-0.75) 6(-1.93,-1.25) 13(1.93,-1.25) 14(1.93,-0.75) 15(1.93,-0.25) 16(1.93,0.25) 17(1.93,0.75) 18(1.93,1.25)
  rrect50% 0.26x0.84 smd: 7(-1.25,-1.93) 8(-0.75,-1.93) 9(-0.25,-1.93) 10(0.25,-1.93) 11(0.75,-1.93) 12(1.25,-1.93) 19(1.25,1.93) 20(0.75,1.93) 21(0.25,1.93) 22(-0.25,1.93) 23(-0.75,1.93) 24(-1.25,1.93)
  rect 2.7x2.7 smd paste-2: 25(0,0)
  silkscreen extent -2.86,-2.03 2.03,2.03, body extent -2,-2 2,2, height 1
SAMTEC_MTSW-106-23-L-S-240 [mm]
  rect 1.37x1.37 smd: 1(6.35,0)
  round 1.37 smd: 2(3.81,0) 3(1.27,0) 4(-1.27,0) 5(-3.81,0) 6(-6.35,0)
  silkscreen extent -7.62,-1.27 8.37,1.27
SOD3718X102N [mm]
  rrect25% 1.38x1.15 smd: A(1.575,0) C(-1.575,0)
  silkscreen extent -2.79,-0.9 1.38,0.9, body extent -1.85,-0.9 1.85,0.9, height 1.02
SODFL4725X110N [mm]
  rect 1.17x1.92 smd: A(2.125,0) C(-2.125,0)
  silkscreen extent -3.3,-1.25 1.22,1.25, body extent -2.35,-1.25 2.35,1.25, height 1.1
SON65P300X300X100-9N [mm]
  rrect25% 0.6x0.3 smd mask+0: 1(-1.4,0.975) 2(-1.4,0.325) 3(-1.4,-0.325) 4(-1.4,-0.975) 5(1.4,-0.975) 6(1.4,-0.325) 7(1.4,0.325) 8(1.4,0.975)
  rect 1.65x2.4 smd paste-2 mask+0.07: 9(0,0)
  silkscreen extent -2.4,-1.5 1.5,1.5, body extent -1.5,-1.5 1.5,1.5, height 1
SW_TL3305BF160QG [mm]
  rrect25% 1.6x1.4 smd: 1(-3.6,-1.5) 2(3.6,-1.5) 3(-3.6,1.5) 4(3.6,1.5)
  silkscreen extent -2.25,-2.25 2.25,2.25, body extent -3.75,-2.25 3.75,2.25, height 5
"THT 3W resistor" [mm]
  round 2 hole 0.9: 1(0,0) 2(22.9,0)
  silkscreen extent 2.9,-3 19.9,3, body extent -0.38,-3.02 23.28,3.02, height 7.02
TRANS_AONR21321#1 [mm]
  rect 0.6x0.35 smd: 1(-1.55,0.975) 2(-1.55,0.325) 3(-1.55,-0.325) 4(-1.55,-0.975)
  round 0.025 smd: 5(0.558,-0.003)
  Top Layer region: -0.637,-1.231 -0.233,-1.231 -0.233,-1.555 0.209,-1.555 0.209,-1.231 0.209,-1.23 1.749,-1.23 1.749,-0.775 1.352,-0.775 1.352,-0.524 1.748,-0.524 1.748,-0.125 1.346,-0.125 1.346,0.126 1.747,0.126 1.747,0.525 1.352,0.525 1.352,0.772 1.747,0.772 1.753,0.778 1.753,1.225 0.216,1.225 0.216,1.225 0.216,1.55 -0.225,1.55 -0.225,1.225 -0.63,1.225 -0.637,1.218
  Top Layer lines w0.01: 1.749,-1.23 1.749,-0.775 1.352,-0.775 ; 1.748,-0.125 1.748,-0.524 1.352,-0.524 1.352,-0.775 ; 1.747,0.126 1.346,0.126 1.346,-0.125 ; 1.747,0.525 1.352,0.525 1.352,0.772 ; 1.746,-1.23 0.209,-1.23 0.209,-1.555 -0.233,-1.555 -0.233,-1.231 -0.637,-1.231 -0.637,1.218 ; 0.99,-0.833 1.048,-0.775 ; 0.99,-0.579 1.048,-0.637 1.048,-0.775 ; 0.863,-0.706 0.98,-0.706 1.048,-0.775 ; 0.863,0.564 0.863,0.818 ; -0.153,-0.452 -0.637,0.032 -0.637,1.218 ; -0.153,0.564 -0.637,1.048 -0.637,1.218 ; 1.352,-0.775 1.048,-0.775 ; 1.352,0.772 1.071,0.772 0.99,0.691 0.863,0.691 ; 1.352,0.772 1.747,0.772 1.753,0.778 1.753,1.225 0.216,1.225 0.216,1.225 0.216,1.55 -0.225,1.55 -0.225,1.225 ; 1.048,-0.775 0.921,-0.775 ; 1.048,-0.775 0.921,-0.775 ; 1.048,-0.775 0.921,-0.775 ; 0.921,-0.775 0.863,-0.833 ; 0.921,-0.775 0.863,-0.833 ; 0.921,-0.775 0.863,-0.833 ; 0.863,0.691 0.863,0.818 ; 0.863,0.691 0.863,0.818 ; -0.225,1.225 -0.63,1.225 ; -0.225,1.225 -0.63,1.225 ; -0.63,1.225 -0.637,1.218
  silkscreen extent -2.16,-1.55 1.55,1.55, body extent -1.65,-1.55 1.55,1.55, height 0.9